# EAGLE board InkTimePCB (EAGLE 9.7.0)
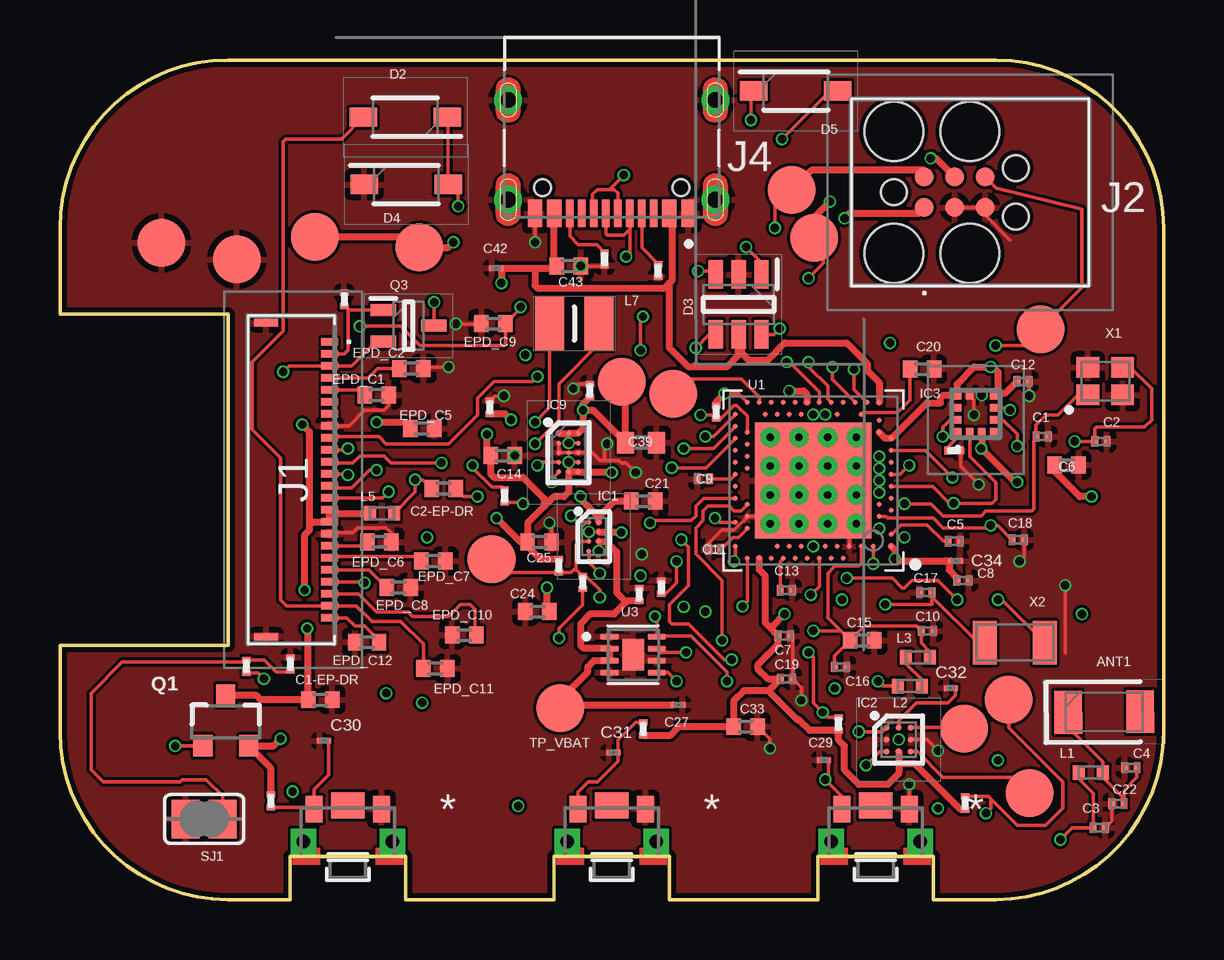
[diagram p0: board, top side]
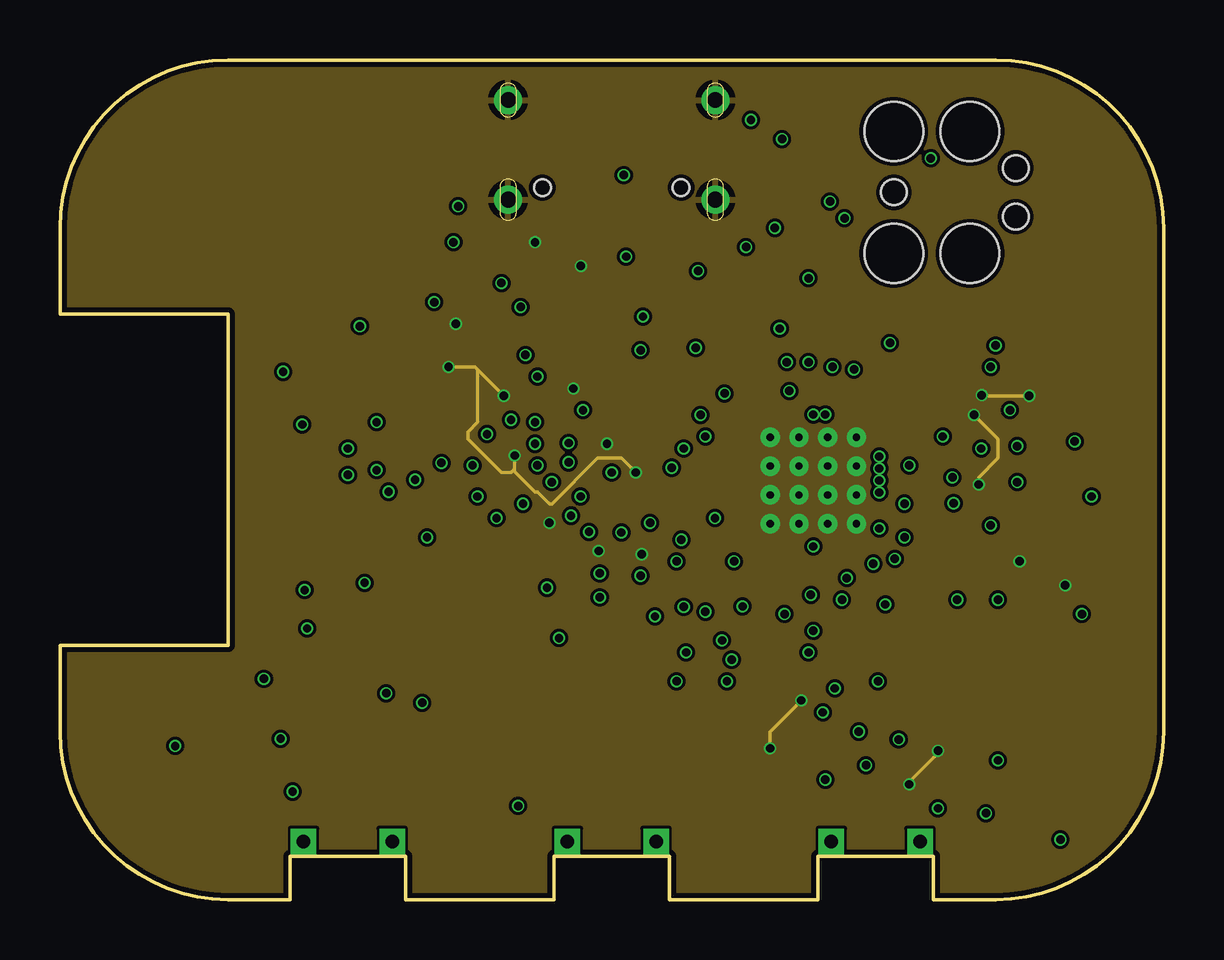
[diagram p1: board, inner layer Route2]
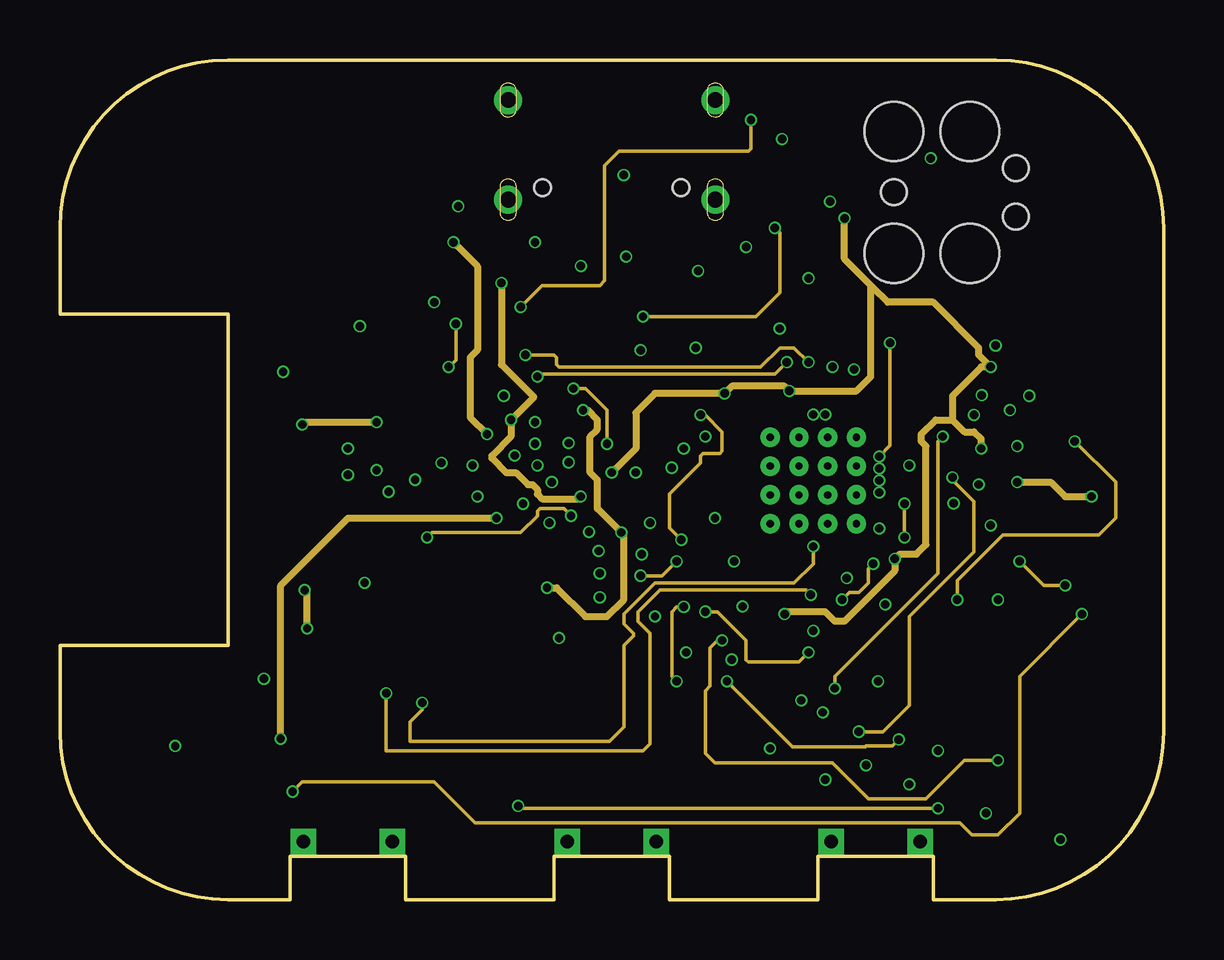
[diagram p2: board, inner layer Route15]
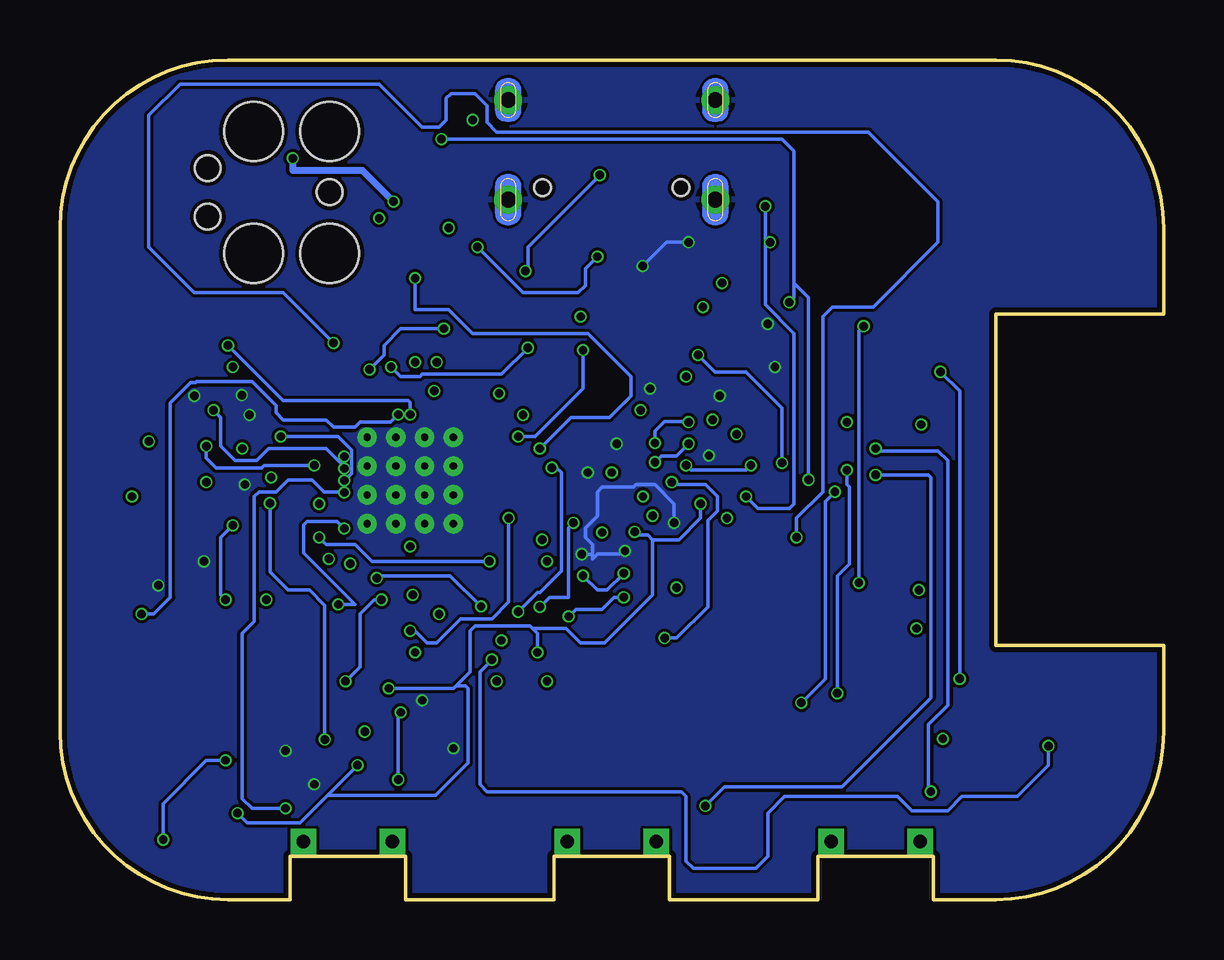
[diagram p3: board, bottom side, seen from below]

Size 46 x 35 mm. Coordinates in mm from the lower left corner, seen from the top.
Outline: 39,0 36.4,0 36.4,1.8 31.6,1.8 31.6,0 25.4,0 25.4,1.8 20.6,1.8 20.6,0 14.4,0 14.4,1.8 9.6,1.8 9.6,0 7,0 arc-90 0,7 0,10.6 7,10.6 7,24.4 0,24.4 0,28 arc-90 7,35 39,35 arc-90 46,28 46,7 arc-90 39,0
Copper layers (1+2*15+16): Top 0.035mm / dielectric 1.6mm / Route2 0.035mm / dielectric 0.15mm / Route15 0.035mm / dielectric 0.2mm / Bottom 0.035mm
Design rules "jlcpcb-2layers.dru *": minimum track width 5mil, minimum drill 0.3mm, track to track 5mil, track to pad 5mil, pad to pad 5mil, via to via 5mil, smd to smd 5mil, copper to edge 0.2mm, drill to drill 6mil, minimum pad ring 10mil, minimum via ring 3mil, stop-mask expansion 4mil, vias tented up to drill 0mil, thermal gap 10mil

## Footprints (pad centres in the part's own frame; a part is rotated, then mirrored left to right if it is on the bottom)
2450AT18B100E_ANTC3216X140N = smd 1.15 x 1.8: 1 -1.5,0; 2 1.5,0
NORDIC_NRF_3_RESC0201_L = smd 0.28 x 0.43: 1 -0.255,0; 2 0.255,0
PERFECT_0402_0402 = smd 0.6 x 0.7: 1 -0.5,0; 2 0.5,0
GRM011R60J152KE01L_1_0201 = smd 0.35 x 0.25: 1 0,0.275; 2 0,-0.275
GRM011R60J152KE01L_2_CAPC0201X13N = smd 0.22 x 0.23: 1 -0.185,0; 2 0.185,0
ESP32_C6_LIBRARY_1_ESP32_WROVER_EAGLE-LTSPICE_C0402 = smd 0.7 x 0.9: 1 -0.65,0; 2 0.65,0
ESP32_C6_LIBRARY_5_SOD3716X135N = smd 1.15 x 0.8: 1 -1.75,0; 2 1.75,0
ESP32_C6_LIBRARY_3_SOT95P280X145-6N = smd 1.2 x 0.6: 1 -1.25,0.95; 2 -1.25,0; 3 -1.25,-0.95; 4 1.25,-0.95; 5 1.25,0; 6 1.25,0.95
BQ25180YBGR_BGA8C40P2X4_100X155X50 = smd 0.2 x 0.2: A1 -0.2,0.6; A2 0.2,0.6; B1 -0.2,0.2; B2 0.2,0.2; C1 -0.2,-0.2; C2 0.2,-0.2; D1 -0.2,-0.6; D2 0.2,-0.6
DRV2605YZFR_BGA9C50P3X3_144X144X62 = smd 0.25 x 0.25: A1 -0.5,0.5; A2 0,0.5; A3 0.5,0.5; B1 -0.5,0; B2 0,0; B3 0.5,0; C1 -0.5,-0.5; C2 0,-0.5; C3 0.5,-0.5
BMA423_BMA423 = smd 0.3 x 0.35: 1 -0.75,-0.775; 2 -0.25,-0.775; 3 0.25,-0.775; 4 0.75,-0.775; 7 0.75,0.775; 8 0.25,0.775; 9 -0.25,0.775; 10 -0.75,0.775 | smd 0.35 x 0.3: 5 0.775,-0.25; 6 0.775,0.25; 11 -0.775,0.25; 12 -0.775,-0.25
RT6160AWSC_BGA15C40P3X5_140X230X60 = smd 0.216 x 0.216: A1 -0.4,0.8; A2 0,0.8; A3 0.4,0.8; B1 -0.4,0.4; B2 0,0.4; B3 0.4,0.4; C1 -0.4,0; C2 0,0; C3 0.4,0; D1 -0.4,-0.4; D2 0,-0.4; D3 0.4,-0.4; E1 -0.4,-0.8; E2 0,-0.8; E3 0.4,-0.8
503480-2400_5034802400 = smd 0.3 x 0.7: 1 -5.75,1.525; 2 -5.25,1.525; 3 -4.75,1.525; 4 -4.25,1.525; 5 -3.75,1.525; 6 -3.25,1.525; 7 -2.75,1.525; 8 -2.25,1.525; 9 -1.75,1.525; 10 -1.25,1.525; 11 -0.75,1.525; 12 -0.25,1.525; 13 0.25,1.525; 14 0.75,1.525; 15 1.25,1.525; 16 1.75,1.525; 17 2.25,1.525; 18 2.75,1.525; 19 3.25,1.525; 20 3.75,1.525; 21 4.25,1.525; 22 4.75,1.525; 23 5.25,1.525; 24 5.75,1.525 | smd 0.3 x 1: MP1 -6.54,-1.125; MP2 6.54,-1.125
TC2030-IDC_TC2030IDC = smd 0.783 x 0.783: 1 -0.953,-0.635; 2 -0.953,0.635; 3 0.317,-0.635; 4 0.317,0.635; 5 1.588,-0.635; 6 1.588,0.635 | hole 2.451: -2.223,-2.54; -2.223,2.54; 0.952,-2.54; 0.952,2.54 | hole 1.067: -2.223,0; 2.857,-1.016; 2.857,1.016
KH-TYPE-C-16P_KINGHELM_KH-TYPE-C-16P = smd 0.6 x 1.15: A1_B12 -3.2,4.725; A4_B9 -2.4,4.725; A9_B4 2.4,4.725; A12_B1 3.2,4.725 | smd 0.3 x 1.15: A5 -1.25,4.725; A6 -0.25,4.725; A7 0.25,4.725; A8 1.25,4.725; B5 1.75,4.725; B6 0.75,4.725; B7 -0.75,4.725; B8 -1.75,4.725 | drill 0.65 pad 1.05: SH1 -4.32,0; SH2 4.32,0; SH3 -4.32,4.15; SH4 4.32,4.15 | hole 0.7: -2.89,3.65; 2.89,3.65
NORDIC_NRF_2_RESC0402_L = smd 0.5 x 0.6: 1 -0.5,0; 2 0.5,0
MLP2016SR47MT0S1_INDC2016X100N = smd 1.2 x 2.2: 1 -1.028,0; 2 1.028,0
ESP32_C6_LIBRARY_4_ESP32_C6_LIBRARY_4_ESP32_C6_LIBRARY_4_ESP32_C6_LIBRARY_4_ESP32_WROVER_SPARKFUN-DISCRETESEMI_SOT23-3 = smd 0.8 x 0.9: 1 -0.95,-1; 2 0.95,-1; 3 0,1.1
ESP32_C6_LIBRARY_6_SOT65P210X110-3N = smd 1.05 x 0.5: 1 -1.05,0.65; 2 -1.05,-0.65; 3 1.05,0
ERA-1AEB3401C_0201 = smd 0.35 x 0.25: 1 0,0.275; 2 0,-0.275
CPF0201D7K68C1_0201 = smd 0.35 x 0.25: 1 0,0.275; 2 0,-0.275
ESP32_C6_LIBRARY_7_JUMPER_SJ = smd 1.168 x 1.6: 1 -0.762,0; 2 0.762,0
2025-10-22_07-23-44_LIBRARY_SW_EVP-AKE31A_PAN = smd 0.711 x 1.092: 1 -1.4,-0.972; 2 1.4,-0.972 | drill 0.559 pad 0.914 square: 3 -1.848,0.381; 4 1.848,0.381 | smd 1.397 x 1.092: 5 0,-1.124
HECTOR_WATCH_1_TP20R = smd 2 x 2: TP 0,0
NORDIC_NRF_4_AQFN50P700X700X85_HS-74N = smd 4.85 x 4.85: P$74 0,0 | drill 0.3 pad 0.6: P$75 -1.8,1.8; P$76 -0.6,1.8; P$77 0.6,1.8; P$78 1.8,1.8; P$79 -1.8,0.6; P$80 -0.6,0.6; P$81 0.6,0.6; P$82 1.8,0.6; P$83 -1.8,-0.6; P$84 -0.6,-0.6; P$85 0.6,-0.6; P$86 1.8,-0.6; P$87 -1.8,-1.8; P$88 -0.6,-1.8; P$89 0.6,-1.8; P$90 1.8,-1.8 | smd 0.2 x 0.2: P$A8 -1.25,3.25; P$A10 -0.75,3.25; P$A12 -0.25,3.25; P$A14 0.25,3.25; P$A16 0.75,3.25; P$A18 1.25,3.25; P$A20 1.75,3.25; P$A22 2.25,3.25; P$A23 2.75,3.25; P$AA24 3.25,-2.25; P$AB2 -2.75,-2.5; P$AC5 -2,-2.75; P$AC9 -1,-2.75; P$AC11 -0.5,-2.75; P$AC13 0,-2.75; P$AC15 0.5,-2.75; P$AC17 1,-2.75; P$AC19 1.5,-2.75; P$AC21 2,-2.75; P$AC24 3.25,-2.75; P$AD2 -2.75,-3.25; P$AD4 -2.25,-3.25; P$AD6 -1.75,-3.25; P$AD8 -1.25,-3.25; P$AD10 -0.75,-3.25; P$AD12 -0.25,-3.25; P$AD14 0.25,-3.25; P$AD16 0.75,-3.25; P$AD18 1.25,-3.25; P$AD20 1.75,-3.25; P$AD22 2.25,-3.25; P$AD23 2.75,-3.25; P$B1 -3.25,2.75; P$B3 -2.5,2.75; P$B5 -2,2.75; P$B7 -1.5,2.75; P$B9 -1,2.75; P$B11 -0.5,2.75; P$B13 0,2.75; P$B15 0.5,2.75; P$B17 1,2.75; P$B19 1.5,2.75; P$B24 3.25,2.75; P$C1 -3.25,2.25; P$D2 -2.75,2; P$D23 2.75,2; P$E24 3.25,1.75; P$F2 -2.75,1.5; P$F23 2.75,1.5; P$G1 -3.25,1.25; P$H2 -2.75,1; P$H23 2.75,1; P$J1 -3.25,0.75; P$J24 3.25,0.75; P$K2 -2.75,0.5; P$L1 -3.25,0.25; P$L24 3.25,0.25; P$M2 -2.75,0; P$N1 -3.25,-0.25; P$N24 3.25,-0.25; P$P2 -2.75,-0.5; P$P23 2.75,-0.5; P$R1 -3.25,-0.75; P$R24 3.25,-0.75; P$T2 -2.75,-1; P$T23 2.75,-1; P$U1 -3.25,-1.25; P$U24 3.25,-1.25; P$V23 2.75,-1.5; P$W1 -3.25,-1.75; P$W24 3.25,-1.75; P$Y2 -2.75,-2; P$Y23 2.75,-2
ESP32_C6_LIBRARY_SON50P200X200X80-9N = smd 0.76 x 0.27: 1 -0.985,0.75; 2 -0.985,0.25; 3 -0.985,-0.25; 4 -0.985,-0.75; 5 0.985,-0.75; 6 0.985,-0.25; 7 0.985,0.25; 8 0.985,0.75 | smd 0.9 x 1.3: 9 0,0
NORDIC_NRF_BT-XTAL_2016_N = smd 0.95 x 0.85: 1 -0.725,-0.575; 2 0.725,-0.575; 3 0.725,0.575; 4 -0.725,0.575
NORDIC_NRF_1_XTAL_3215_N = smd 1 x 1.8: 1 -1.25,0; 2 1.25,0

## Placement (x,y rotation side)
ANT1  2450AT18B100E  [2450AT18B100E_ANTC3216X140N]  43.53,7.82 0.5 top
C1  12pF  [NORDIC_NRF_3_RESC0201_L]  40.94,19.3 0 top
C1-EP-DR  10uF  [PERFECT_0402_0402]  10.85,8.33 0 top
C2  12pF  [NORDIC_NRF_3_RESC0201_L]  43.39,19.1 0 top
C2-EP-DR  4.7uF/25V  [PERFECT_0402_0402]  16,17.13 180 top
C3  1pF  [NORDIC_NRF_3_RESC0201_L]  43.32,3 0 top
C4  1pF  [NORDIC_NRF_3_RESC0201_L]  44.64,5.5 180 top
C5  100nF  [NORDIC_NRF_3_RESC0201_L]  37.27,14.94 0 top
C6  4.7uF  [PERFECT_0402_0402]  41.96,18.11 0 top
C7  100nF  [NORDIC_NRF_3_RESC0201_L]  30.19,11 0 top
C8  100nF  [NORDIC_NRF_3_RESC0201_L]  37.64,13.3 0 top
C9  820pF N.C.  [NORDIC_NRF_3_RESC0201_L]  26.82,17.54 180 top
C10  N.C.  [NORDIC_NRF_3_RESC0201_L]  36.16,11.2 0 top
C11  100pF  [NORDIC_NRF_3_RESC0201_L]  27.29,14.6 180 top
C12  100nF  [NORDIC_NRF_3_RESC0201_L]  40.14,21.6 0 top
C13  N.C.  [NORDIC_NRF_3_RESC0201_L]  30.28,12.9 0 top
C14  4.7uF  [PERFECT_0402_0402]  18.45,18.51 0 top
C15  1.0uF  [PERFECT_0402_0402]  33.44,10.81 0 top
C16  47nF  [NORDIC_NRF_3_RESC0201_L]  32.54,9.7 0 top
C17  12pF  [NORDIC_NRF_3_RESC0201_L]  36.09,12.8 0 top
C18  12pF  [NORDIC_NRF_3_RESC0201_L]  39.94,15 180 top
C19  100nF  [NORDIC_NRF_3_RESC0201_L]  30.29,9.2 0 top
C20  4.7uF  [PERFECT_0402_0402]  35.93,22.11 0 top
C21  4.7uF  [PERFECT_0402_0402]  24.32,16.61 0 top
C22  N.C.  [NORDIC_NRF_3_RESC0201_L]  44.1,4 180 top
C23  0.1uF  [GRM011R60J152KE01L_1_0201]  22.09,21.22 0 top
C24  10uF  [PERFECT_0402_0402]  19.9,12.01 0 top
C25  22uF  [PERFECT_0402_0402]  19.99,14.91 0 top
C27  0.1uF  [GRM011R60J152KE01L_2_CAPC0201X13N]  25.77,8.12 180 top
C29  1uF  [GRM011R60J152KE01L_2_CAPC0201X13N]  31.85,5.82 0 top
C30  1uF  [GRM011R60J152KE01L_2_CAPC0201X13N]  11.01,6.62 0 top
C31  1uF  [GRM011R60J152KE01L_2_CAPC0201X13N]  23.07,6.12 0 top
C32  1uF  [GRM011R60J152KE01L_2_CAPC0201X13N]  37.13,8.82 0 top
C33  22uF  [PERFECT_0402_0402]  28.58,7.21 0 top
C34  0.1uF  [GRM011R60J152KE01L_2_CAPC0201X13N]  37.33,14.12 180 top
C37  1uF  [GRM011R60J152KE01L_1_0201]  24.15,12.72 0 top
C38  1uF  [GRM011R60J152KE01L_1_0201]  17.91,20.52 0 top
C39  10uF  [ESP32_C6_LIBRARY_1_ESP32_WROVER_EAGLE-LTSPICE_C0402]  24.22,19.05 0 top
C42  0.1uF  [GRM011R60J152KE01L_2_CAPC0201X13N]  18.19,26.32 0 top
C43  4.7uF  [PERFECT_0402_0402]  21.21,26.41 0 top
D2  MBR0530  [ESP32_C6_LIBRARY_5_SOD3716X135N]  14.39,32.61 180 top
D3  USBLC6-2SC6Y  [ESP32_C6_LIBRARY_3_SOT95P280X145-6N]  28.29,24.81 270 top
D4  MBR0530  [ESP32_C6_LIBRARY_5_SOD3716X135N]  14.43,29.81 0 top
D5  MBR0530  [ESP32_C6_LIBRARY_5_SOD3716X135N]  30.67,33.71 0 top
EPD_C1  1uF/50V  [PERFECT_0402_0402]  13.2,21.03 180 top
EPD_C2  1uF/50V  [PERFECT_0402_0402]  14.65,22.13 180 top
EPD_C5  1uF/50V  [PERFECT_0402_0402]  15.1,19.63 180 top
EPD_C6  1uF/50V  [PERFECT_0402_0402]  13.32,14.91 180 top
EPD_C7  1uF/50V  [PERFECT_0402_0402]  15.57,14.11 180 top
EPD_C8  1uF/50V  [PERFECT_0402_0402]  14.12,13.01 180 top
EPD_C9  1uF/50V  [PERFECT_0402_0402]  18.07,24.01 0 top
EPD_C10  1uF/50V  [PERFECT_0402_0402]  16.85,11.03 0 top
EPD_C11  1uF/50V  [PERFECT_0402_0402]  15.65,9.63 180 top
EPD_C12  1uF/50V  [PERFECT_0402_0402]  12.8,10.73 0 top
IC1  BQ25180YBGR  [BQ25180YBGR_BGA8C40P2X4_100X155X50]  22.25,15.13 0 top
IC2  DRV2605YZFR  [DRV2605YZFR_BGA9C50P3X3_144X144X62]  34.96,6.67 0 top
IC3  BMA423  [BMA423_BMA423]  38.17,20.25 0 top
IC9  RT6160AWSC  [RT6160AWSC_BGA15C40P3X5_140X230X60]  21.2,18.63 0 top
J1  503480-2400  [503480-2400_5034802400]  9.72,17.5 270 top
J2  TC2030-IDC  [TC2030-IDC_TC2030IDC]  36.98,29.48 0 top
J4  KH-TYPE-C-16P  [KH-TYPE-C-16P_KINGHELM_KH-TYPE-C-16P]  23,33.33 180 top
L1  3.9nH  [NORDIC_NRF_2_RESC0402_L]  42.97,5.3 0 top
L2  10uH  [NORDIC_NRF_2_RESC0402_L]  35.42,8.9 0 top
L3  15nH  [NORDIC_NRF_2_RESC0402_L]  35.77,10.1 0 top
L5  68uH  [NORDIC_NRF_2_RESC0402_L]  13.42,16.1 0 top
L7  FTC252012SR47MBCA  [MLP2016SR47MT0S1_INDC2016X100N]  21.44,24.01 0 top
Q1  DMG2305UX-7 20V/4.2A/52mΩ/1.4W  [ESP32_C6_LIBRARY_4_ESP32_C6_LIBRARY_4_ESP32_C6_LIBRARY_4_ESP32_C6_LIBRARY_4_ESP32_WROVER_SPARKFUN-DISCRETESEMI_SOT23-3]  6.91,7.41 0 top
Q3  SI1308EDL-T1-GE3  [ESP32_C6_LIBRARY_6_SOT65P210X110-3N]  14.53,23.92 0 top
R1_EP_DR  0.47  [ERA-1AEB3401C_0201]  7.77,9.72 0 top
R1_USB  5K1  [CPF0201D7K68C1_0201]  24.93,26.22 180 top
R2  0  [ERA-1AEB3401C_0201]  21.79,13.22 0 top
R2_EP_DR  10K  [ERA-1AEB3401C_0201]  11.85,25.02 0 top
R2_USB  5K1  [CPF0201D7K68C1_0201]  22.7,26.7 0 top
R3  0  [CPF0201D7K68C1_0201]  37.27,18.72 270 top
R4  0  [ERA-1AEB3401C_0201]  18.53,16.82 180 top
R5  10k  [CPF0201D7K68C1_0201]  8.79,4.12 180 top
R7  10k  [CPF0201D7K68C1_0201]  32.45,7.32 0 top
R8  10k  [CPF0201D7K68C1_0201]  24.31,7.12 0 top
R9  10K  [ERA-1AEB3401C_0201]  25.07,13.02 0 top
R17  3K3  [ERA-1AEB3401C_0201]  37.73,4.02 180 top
R18  3K3  [ERA-1AEB3401C_0201]  20.79,13.92 0 top
R_PWR_EPD  10K  [CPF0201D7K68C1_0201]  27.35,20.32 180 top
R_TYPE_SEL  2.2  [ERA-1AEB3401C_0201]  9.61,9.82 0 top
SJ1  0  [ESP32_C6_LIBRARY_7_JUMPER_SJ]  6.01,3.36 0 top
SW_DN  2025-10-22_07-23-44_LIBRARY_EVP-AKE31ASW_EVP-AKE31A_PAN  [2025-10-22_07-23-44_LIBRARY_SW_EVP-AKE31A_PAN]  34,2.8 180 top
SW_ENT  2025-10-22_07-23-44_LIBRARY_EVP-AKE31ASW_EVP-AKE31A_PAN  [2025-10-22_07-23-44_LIBRARY_SW_EVP-AKE31A_PAN]  23,2.8 180 top
SW_UP  2025-10-22_07-23-44_LIBRARY_EVP-AKE31ASW_EVP-AKE31A_PAN  [2025-10-22_07-23-44_LIBRARY_SW_EVP-AKE31A_PAN]  12,2.8 180 top
TP_3.3V  HECTOR_WATCH_1_TPTP20R  [HECTOR_WATCH_1_TP20R]  14.98,27.18 0 top
TP_3V3  HECTOR_WATCH_1_TPTP20R  [HECTOR_WATCH_1_TP20R]  10.63,27.63 0 top
TP_BAT_GND  HECTOR_WATCH_1_TPTP20R  [HECTOR_WATCH_1_TP20R]  4.23,27.38 0 top
TP_GND  HECTOR_WATCH_1_TPTP20R  [HECTOR_WATCH_1_TP20R]  7.37,26.68 0 top
TP_ON  HECTOR_WATCH_1_TPTP20R  [HECTOR_WATCH_1_TP20R]  40.41,4.43 0 top
TP_OP  HECTOR_WATCH_1_TPTP20R  [HECTOR_WATCH_1_TP20R]  37.69,7.13 0 top
TP_RESET  HECTOR_WATCH_1_TPTP20R  [HECTOR_WATCH_1_TP20R]  40.87,23.78 0 top
TP_SCL  HECTOR_WATCH_1_TPTP20R  [HECTOR_WATCH_1_TP20R]  39.55,8.33 0 top
TP_SDA  HECTOR_WATCH_1_TPTP20R  [HECTOR_WATCH_1_TP20R]  17.99,14.18 0 top
TP_SWDCLK  HECTOR_WATCH_1_TPTP20R  [HECTOR_WATCH_1_TP20R]  31.43,27.58 0 top
TP_SWDIO  HECTOR_WATCH_1_TPTP20R  [HECTOR_WATCH_1_TP20R]  30.5,29.58 0 top
TP_SWO  HECTOR_WATCH_1_TPTP20R  [HECTOR_WATCH_1_TP20R]  25.56,21.08 0 top
TP_VBAT  HECTOR_WATCH_1_TPTP20R  [HECTOR_WATCH_1_TP20R]  20.85,7.98 0 top
TP_VREG  HECTOR_WATCH_1_TPTP20R  [HECTOR_WATCH_1_TP20R]  23.41,21.58 0 top
U1  NRF52840_QF  [NORDIC_NRF_4_AQFN50P700X700X85_HS-74N]  31.4,17.47 180 top
U3  MAX17048G+T10  [ESP32_C6_LIBRARY_SON50P200X200X80-9N]  23.89,10.21 0 top
X1  32MHz  [NORDIC_NRF_BT-XTAL_2016_N]  43.57,21.61 0 top
X2  32.768kHz  [NORDIC_NRF_1_XTAL_3215_N]  39.8,10.71 0 top

## Library data of the parts
ANT1 = InkTime_v5; ARROW_PART_NUMBER: 2450AT18B100E; ARROW_PRICE-STOCK: https://www.arrow.com/en/products/2450at18b100e/johanson-dielectrics?utm_currency=USD&region=nac; DESCRIPTION: Antennas 2.45GHz ANTENNA; HEIGHT: 1.4mm; MANUFACTURER_NAME: JOHANSON TECHNOLOGY; MANUFACTURER_PART_NUMBER: 2450AT18B100E; MOUSER_PART_NUMBER: 609-2450AT18B100E; MOUSER_PRICE-STOCK: https://www.mouser.co.uk/ProductDetail/Johanson-Technology/2450AT18B100E?qs=yCnrNFeXz%252Bh5MFsFIXGZGA%3D%3D
C1 C1-EP-DR C2 C2-EP-DR C3-C25 C33 C37 C38 C43 EPD_C1 EPD_C2 EPD_C5-EPD_C12 L1-L3 L5 R1_EP_DR R1_USB R2 R2_EP_DR R2_USB R3-R5 R7-R9 R17 R18 R_PWR_EPD R_TYPE_SEL SJ1 TP_3.3V TP_3V3 TP_BAT_GND TP_GND TP_ON TP_OP TP_RESET TP_SCL TP_SDA TP_SWDCLK TP_SWDIO TP_SWO TP_VBAT TP_VREG U1 X1 X2 = InkTime_v5
C27 C29-C32 C34 C42 = InkTime_v5; AVAILABILITY: In Stock; CHECK_PRICES: https://www.snapeda.com/parts/GRM011R60J152KE01L/Murata/view-part/?ref=eda; DESCRIPTION: SMD Capacitor X5R(EIA) with Capacitance: 1500pF Tol. 10%. Rated Voltage: 6.3Vdc; MF: Murata; MP: GRM011R60J152KE01L; PACKAGE: 0201 Murata; PRICE: None; SNAPEDA_LINK: https://www.snapeda.com/parts/GRM011R60J152KE01L/Murata/view-part/?ref=snap
C39 = InkTime_v5; SPICEMODEL: NONE; SPICEPREFIX: C
D2 D4 D5 = InkTime_v5; AVAILABILITY: In Stock; CHECK_PRICES: https://www.snapeda.com/parts/MBR0530/Onsemi/view-part/?ref=eda; DESCRIPTION: Diode Schottky 30 V 500mA Surface Mount SOD-123; MF: ON Semiconductor; MP: MBR0530; PACKAGE: SOD-123-2 ON Semiconductor; PRICE: None; PURCHASE-URL: https://www.snapeda.com/api/url_track_click_mouser/?unipart_id=179458&manufacturer=ON Semiconductor&part_name=MBR0530&search_term=None; SNAPEDA_LINK: https://www.snapeda.com/parts/MBR0530/Onsemi/view-part/?ref=snap
D3 = InkTime_v5; AVAILABILITY: In Stock; CHECK_PRICES: https://www.snapeda.com/parts/USBLC6-2SC6Y/STMicroelectronics/view-part/?ref=eda; DESCRIPTION: 17V Clamp 5A (8/20µs) Ipp Tvs Diode Surface Mount SOT-23-6; MF: STMicroelectronics; MP: USBLC6-2SC6Y; PACKAGE: SOT-23-6 STMicroelectronics; PRICE: None; SNAPEDA_LINK: https://www.snapeda.com/parts/USBLC6-2SC6Y/STMicroelectronics/view-part/?ref=snap
IC1 = InkTime_v5; ARROW_PART_NUMBER: BQ25180YBGR; ARROW_PRICE-STOCK: https://www.arrow.com/en/products/bq25180ybgr/texas-instruments?utm_currency=USD&region=nac; DESCRIPTION: Charger IC Lithium Ion/Polymer, Lithium Iron Phosphate 8-DSBGA (1.6x1.1); HEIGHT: 0.5mm; MANUFACTURER_NAME: Texas Instruments; MANUFACTURER_PART_NUMBER: BQ25180YBGR; MOUSER_PART_NUMBER: 595-BQ25180YBGR; MOUSER_PRICE-STOCK: https://www.mouser.co.uk/ProductDetail/Texas-Instruments/BQ25180YBGR?qs=doiCPypUmgEWjAK%252BJAX6Tw%3D%3D
IC2 = InkTime_v5; ARROW_PART_NUMBER: DRV2605YZFR; ARROW_PRICE-STOCK: https://www.arrow.com/en/products/drv2605yzfr/texas-instruments?region=nac; DESCRIPTION: Haptic Driver for ERM/LRA with Built-In Library and Smart Loop Architecture; HEIGHT: 0.625mm; MANUFACTURER_NAME: Texas Instruments; MANUFACTURER_PART_NUMBER: DRV2605YZFR
IC3 = InkTime_v5; ARROW_PART_NUMBER: BMA423; ARROW_PRICE-STOCK: https://www.arrow.com/en/products/bma423/bosch; DESCRIPTION: Accelerometers Triaxial low-g 12bit Acceleration Sensor; HEIGHT: 1mm; MANUFACTURER_NAME: BOSCH; MANUFACTURER_PART_NUMBER: BMA423; MOUSER_PART_NUMBER: 262-BMA423; MOUSER_PRICE-STOCK: https://www.mouser.co.uk/ProductDetail/Bosch-Sensortec/BMA423?qs=HXFqYaX1Q2xC%252BSgeGoX3mg%3D%3D
IC9 = InkTime_v5; DESCRIPTION: Buck-Boost Regulator Positive Output Step-Up/Step-Down I2C DC-DC Controller IC 15-WL-CSP (BSC) (1.4x2.3); HEIGHT: 0.6mm; MANUFACTURER_NAME: RICHTEK; MANUFACTURER_PART_NUMBER: RT6160AWSC; MOUSER_PART_NUMBER: 835-RT6160AWSC; MOUSER_PRICE-STOCK: https://www.mouser.co.uk/ProductDetail/Richtek/RT6160AWSC?qs=amGC7iS6iy%2FLd9PSoixZXQ%3D%3D
J1 = InkTime_v5; DESCRIPTION: FFC & FPC Connectors 0.5mm FPC RA SMT Dual Contact 24Ckt; HEIGHT: 1.87mm; MANUFACTURER_NAME: Molex; MANUFACTURER_PART_NUMBER: 503480-2400; MOUSER_PART_NUMBER: 538-503480-2400; MOUSER_PRICE-STOCK: https://www.mouser.co.uk/ProductDetail/Molex/503480-2400?qs=OAhjpuo3Vu7efIoxFh9AOw%3D%3D
J2 = InkTime_v5; DESCRIPTION: CABLE ADAPTER 6 POS; HEIGHT: 19mm; MANUFACTURER_NAME: Tag Connect; MANUFACTURER_PART_NUMBER: TC2030-IDC
J4 = InkTime_v5; AVAILABILITY: Not in stock; CHECK_PRICES: https://www.snapeda.com/parts/KH-TYPE-C-16P/Kinghelm/view-part/?ref=eda; MF: kinghelm; MP: KH-TYPE-C-16P; PACKAGE: None; PRICE: None; SNAPEDA_LINK: https://www.snapeda.com/parts/KH-TYPE-C-16P/Kinghelm/view-part/?ref=snap
L7 = InkTime_v5; DESCRIPTION: SMD / SMT Inductors (Coils), L=0.47?H, L x W x T :; HEIGHT: 1mm; JLCPCB: https://jlcpcb.com/partdetail/6763488-FTC252012SR47MBCA/C5832368; MANUFACTURER_NAME: TDK; MANUFACTURER_PART_NUMBER: FTC252012SR47MBCA
Q1 = InkTime_v5; PROD_ID: TRAN-14388
Q3 = InkTime_v5; AVAILABILITY: In Stock; CHECK_PRICES: https://www.snapeda.com/parts/SI1308EDL-T1-GE3/Vishay+Siliconix/view-part/?ref=eda; DESCRIPTION: Si1308EDL-T1-GE3 N-channel MOSFET Transistor, 1.5 A, 30 V, 3-Pin SC-70 | Siliconix / Vishay SI1308EDL-T1-GE3; MF: Vishay Siliconix; MP: SI1308EDL-T1-GE3; PACKAGE: SOT-323 Vishay Semiconductor; PRICE: None; PURCHASE-URL: https://www.snapeda.com/api/url_track_click_mouser/?unipart_id=274603&manufacturer=Vishay Siliconix&part_name=SI1308EDL-T1-GE3&search_term=None; SNAPEDA_LINK: https://www.snapeda.com/parts/SI1308EDL-T1-GE3/Vishay+Siliconix/view-part/?ref=snap
SW_DN SW_ENT SW_UP = InkTime_v5; COPYRIGHT: Copyright (C) 2025 Ultra Librarian. All rights reserved.; DIGI-KEY_PART_NUMBER_1: P123437TR-ND; DIGI-KEY_PART_NUMBER_2: P123437CT-ND; DIGI-KEY_PART_NUMBER_3: P123437DKR-ND; MANUFACTURER_NAME: Panasonic; MANUFACTURER_PART_NUMBER: EVP-AKE31A
U3 = InkTime_v5; AVAILABILITY: In Stock; CHECK_PRICES: https://www.snapeda.com/parts/MAX17048G+T10/Analog+Devices/view-part/?ref=eda; DESCRIPTION: 3µA 1-Cell/2-Cell Fuel Gauge with ModelGauge; MF: Analog Devices; MP: MAX17048G+T10; PACKAGE: TDFN-8 Maxim; PRICE: None; PURCHASE-URL: https://www.snapeda.com/api/url_track_click_mouser/?unipart_id=329239&manufacturer=Analog Devices&part_name=MAX17048G+T10&search_term=None; SNAPEDA_LINK: https://www.snapeda.com/parts/MAX17048G+T10/Analog+Devices/view-part/?ref=snap

## Nets
3V3: C6.1 C7.1 C8.1 C12.1 C14.1 C19.1 C25.1 C33.1 C34.2 IC2.C2 IC3.3 IC3.7 IC3.10 IC9.E2 IC9.E3 J2.1 Q1.2 R5.2 R7.2 R8.2 R17.1 R18.1 R_PWR_EPD.2 TP_3.3V.TP TP_3V3.TP U1.P$A22 U1.P$AD14 U1.P$AD23 U1.P$B1 U1.P$W1 U1.P$Y2
ALERT: U1.P$J24 U3.5
D+: D3.4 U1.P$AD6
D-: D3.6 U1.P$AD4
DEC1: C5.1 U1.P$C1
DEC3: C11.1 U1.P$D23
DEC4_6: C10.1 C15.1 C16.1 L3.2 U1.P$B5 U1.P$E24
DN: D3.1 J4.A7 J4.B7
DP: D3.3 J4.A6 J4.B6
EPD_3V3: C1-EP-DR.1 EPD_C5.2 J1.15 J1.16 L5.1 Q1.3
EPD_BUSY: J1.9 U1.P$AD12
EPD_CS: J1.12 U1.P$K2
EPD_DC: J1.11 U1.P$AD10
EPD_RST: J1.10 U1.P$AC11
GDR: J1.2 Q3.1 R2_EP_DR.2
GND: C1-EP-DR.2 C1.2 C2.2 C3.2 C4.2 C5.2 C6.2 C7.2 C8.2 C9.2 C10.2 C11.2 C12.2 C13.2 C14.2 C15.2 C16.2 C17.1 C18.1 C19.2 C20.2 C21.2 C22.2 C23.1 C24.1 C25.2 C27.1 C29.1 C30.1 C31.1 C32.1 C33.2 C34.1 C37.1 C38.1 C39.2 C42.1 C43.2 D3.2 D4.1 EPD_C1.1 EPD_C2.1 EPD_C5.1 EPD_C6.1 EPD_C7.1 EPD_C8.1 EPD_C9.1 EPD_C10.1 EPD_C11.1 EPD_C12.1 IC1.D2 IC2.B1 IC2.B3 IC3.8 IC3.9 IC9.B1 IC9.C1 IC9.C2 IC9.C3 J1.8 J1.17 J1.MP1 J1.MP2 J2.3 J2.5 J4.A1_B12 J4.A12_B1 J4.SH1 J4.SH2 J4.SH3 J4.SH4 R1_USB.1 R2_EP_DR.1 R2_USB.2 R3.1 R9.1 R_TYPE_SEL.1 SJ1.1 SW_DN.1 SW_ENT.1 SW_UP.1 TP_BAT_GND.TP TP_GND.TP U1.P$74 U1.P$75 U1.P$76 U1.P$77 U1.P$78 U1.P$79 U1.P$80 U1.P$81 U1.P$82 U1.P$83 U1.P$84 U1.P$85 U1.P$86 U1.P$87 U1.P$88 U1.P$89 U1.P$90 U1.P$B7 U1.P$F23 U3.1 U3.4 U3.6 U3.9 X1.2 X1.4
HAPTIC_EN: IC2.A1 U1.P$U1
IMU_INT1: IC3.5 U1.P$N1
IMU_INT2: IC3.6 U1.P$P2
LX1: IC9.B2 IC9.B3 L7.1
LX2: IC9.D2 IC9.D3 L7.2
MOSI: J1.14 U1.P$B13
N$1: ANT1.1 C4.1 C22.1 L1.2
N$2: IC9.D1 R4.2
N$3: IC1.D1 R9.2
N$4: C2.1 U1.P$A23 X1.3
N$5: IC9.E1 R2.2
N$6: J4.A5 R1_USB.2
N$7: L2.2 L3.1
N$8: IC3.1 R3.2
N$9: C1.1 U1.P$B24 X1.1
N$10: C3.1 L1.1 U1.P$H23
N$11: C32.2 IC2.A2
N$13: C2-EP-DR.1 D2.1 D4.2
N$14: C9.1 U1.P$N24
N$15: R1_EP_DR.1 R_TYPE_SEL.2 SJ1.2
N$16: C2-EP-DR.2 D5.2 L5.2 Q3.3
N$17: EPD_C2.2 J1.4
N$18: EPD_C1.2 J1.5
N$20: C20.1 U1.P$AC5
N$22: L2.1 U1.P$B3
N$26: J4.B5 R2_USB.1
N$30: EPD_C6.2 J1.18
N$31: EPD_C7.2 J1.19
N$32: EPD_C8.2 J1.20
N$34: EPD_C10.2 J1.22
N$35: C13.1 U1.P$A18
N$37: EPD_C12.2 J1.24
OUT+: IC2.A3 TP_OP.TP
OUT-: IC2.C3 TP_ON.TP
P0.00/XL1: C17.2 U1.P$D2 X2.1
P0.01/XL2: C18.2 U1.P$F2 X2.2
P0.04: U1.P$J1
P0.09: U1.P$L24
P0.13: C30.2 R5.1 SW_UP.2
P0.14: C31.2 R8.1 SW_ENT.2
P0.19: U1.P$AC15
P0.20: U1.P$AD16
P0.21: U1.P$AC17
P0.22: U1.P$AD18
P0.23: U1.P$AC19
P0.24: U1.P$AD20
P0.25: U1.P$AC21
P0.26: U1.P$G1
P0.27: U1.P$H2
P0.28: U1.P$B11
P0.29: U1.P$A10
P0.30: U1.P$B9
P0.31: U1.P$A8
P1.01: Q1.1 R_PWR_EPD.1 U1.P$Y23
P1.02: C29.2 R7.1 SW_DN.2 U1.P$W24
P1.03: U1.P$V23
P1.04: U1.P$U24
P1.05: U1.P$T23
P1.06: U1.P$R24
P1.07: U1.P$P23
P1.09: U1.P$R1
P1.10: U1.P$A20
P1.11: U1.P$B19
P1.12: U1.P$B17
P1.13: U1.P$A16
P1.14: U1.P$B15
P1.15: U1.P$A14
PMIC_INT: IC1.A1 U1.P$T2
PO.13: U1.P$AD8
PO.14: U1.P$AC9
PREVGH: D5.1 EPD_C9.2 J1.21
PREVGL: D2.2 EPD_C11.2 J1.23
RESE: J1.3 Q3.2 R1_EP_DR.2
RESET: J2.6 TP_RESET.TP U1.P$AC13
SCK: J1.13 U1.P$A12
SCL: IC1.B1 IC2.C1 IC3.12 R4.1 R17.2 TP_SCL.TP U1.P$M2 U3.7
SDA: IC1.C1 IC2.B2 IC3.2 R2.1 R18.2 TP_SDA.TP U1.P$L1 U3.8
SWDCLK: J2.4 TP_SWDCLK.TP U1.P$AA24
SWDIO: J2.2 TP_SWDIO.TP U1.P$AC24
SWO: TP_SWO.TP U1.P$AD22
VBAT: C27.2 C37.2 IC1.C2 TP_VBAT.TP U3.2 U3.3
VBUS: C21.1 C38.2 C42.2 C43.1 D3.5 IC1.A2 J4.A4_B9 J4.A9_B4 U1.P$AD2
VREG: C23.2 C24.2 C39.1 IC1.B2 IC9.A1 IC9.A2 IC9.A3 TP_VREG.TP

## Tracks (layer width: path | path; a pad name or v marks a point on that pad's centre or on a via)
3V3  (via drill 0.35)
  Top 0.15: U1.P$AD23 28.3,21.07 28.3,21.1 v27.7,21.1
  Top 0.3: TP_3V3.TP 14.53,27.63 TP_3.3V.TP 16.18,27.18 v16.4,27.4 | v17.8,19.4 17.8,18.66 C14.1 17.95,17.75 18.1,17.6 19.3,17.6 20.2,16.7 20.2,16.4 | 20.2,16.4 20.6,16.8 21,16.8 21.2,17 IC9.E2 IC9.E3 22.97,17.83 v23,17.8 | 20.2,16.4 19.49,15.69 C25.1 | C25.1 19.49,14.71 20,14.19 R18.1 | R8.2 25.45,6.84 25.81,7.21 C33.1 28.08,8.28 28.5,8.7 29.54,8.7 | 29.54,8.7 C19.1 29.5,9.2 29.1,9.6 29.1,9.8 29.93,10.64 C7.1 29.57,11.37 | 29.57,11.37 29.4,11.53 29.4,13.5 29.15,13.75 U1.P$A22 | U1.P$B1 34.8,14.57 v34.8,14.2 34.9,14.1 36.9,14.1 | v30.2,11.9 29.67,11.37 29.57,11.37 | C8.1 37.39,13.41 37.06,13.74 37.06,14.1 36.9,14.1 | C12.1 39.39,21.1 39.1,21.1 | 39.1,21.1 39,21.1 IC3.7 | IC3.3 38.42,18.82 | 38.42,18.82 v38.4,18.8 | 39.1,21.1 39.1,22 38.9,22.2 v38.8,22.2 38.1,22.2 37.4,21.5 37.4,21.05 IC3.10 36.83,21.03 36.7,20.9 36.7,20.7 36.13,20.7 U1.P$W1 34.4,19.22 U1.P$Y2 | J2.1 35.78,28.6 32.9,28.6 v32.7,28.4 | R5.2 8.79,5.48 Q1.2 8.91,6.41 v9.2,6.7 | C25.1 19.19,14.91 v18.2,15.9 | IC2.C2 34.96,5.66 | 34.96,5.66 34.96,5.26 34.5,4.8 33.3,4.8 32.7,5.4 32.7,6.4 32.45,6.65 R7.2 31.25,7.05 30.8,7.5 30.74,7.5 29.54,8.7 | R17.1 37.56,3.75 35.64,5.66 34.96,5.66 | v30.4,21.2 31,21.2 31.14,21.06 31.14,20.74 U1.P$AD14 | v27.7,21.1 27.35,20.75 R_PWR_EPD.2 | 36.9,14.1 36.92,14.12 C34.2 | 38.42,18.82 38.42,18.78 39.8,17.4 v39.9,17.4 | v43,16.8 42.5,16.8 41.46,17.84 C6.1
  Route15 0.3: v16.4,27.4 17.4,26.4 17.4,22.9 17.1,22.6 17.1,20.1 v17.8,19.4 | v34.8,14.2 34.8,13.7 32.7,11.6 32.3,11.6 31.9,12 30.3,12 v30.2,11.9 | v38.4,18.8 38.4,19.2 38.1,19.5 37.7,19.5 37.2,20 | 37.2,20 37.2,21 38.4,22.2 v38.8,22.2 38.3,22.7 38.3,23 36.4,24.9 34.5,24.9 33.85,25.55 | 37.2,20 36.5,20 35.9,19.4 35.9,19.1 36.1,18.9 36.1,14.8 35.7,14.4 35,14.4 v34.8,14.2 | v23,17.8 24,18.8 24,20.3 24.8,21.1 v27.7,21.1 28,21.4 30.2,21.4 v30.4,21.2 33.2,21.2 33.8,21.8 33.8,25.5 33.85,25.55 | v9.2,6.7 9.2,13.1 12,15.9 v18.2,15.9 | v34.8,14.2 34.9,14.3 | 33.85,25.55 32.7,26.7 v32.7,28.4 | v39.9,17.4 41.3,17.4 41.9,16.8 v43,16.8
ALERT  (via drill 0.35)
  Top 0.15: U3.5 25.34,9.46 v25.7,9.1 | v24.6,15.7 24.7,15.8 26.3,15.8 26.5,16 26.5,16.4 26.82,16.72 U1.P$J24
  Route15 0.15: v25.7,9.1 25.5,9.3 25.5,12 25.7,12.2 v26,12.2
  Bottom 0.15: v26,12.2 25.6,12.6 24.8,12.6 24.8,15.5 v24.6,15.7
D+  (via drill 0.35)
  Top 0.15: U1.P$AD6 32.2,21.67 v32.2,22.2 | v26.5,23 27.06,23.56 D3.4
  Bottom 0.15: v32.2,22.2 31.8,21.8 31,21.8 30.9,21.9 27.6,21.9 v26.5,23
D-  (via drill 0.35)
  Top 0.15: U1.P$AD4 33.1,21.27 v33.1,22.1 | v30,23.8 29.76,23.56 D3.6
  Bottom 0.15: v33.1,22.1 32.5,22.7 32.5,23.1 31.8,23.8 v30,23.8
DEC1
  Top 0.15: C5.1 36.81,14.94 36.14,15.62 35.05,15.62 U1.P$C1
DEC3
  Top 0.15: C11.1 28.04,15.1 28.28,15.1 U1.P$D23
DEC4_6  (via drill 0.35)
  Top 0.15: C16.1 32.28,10.16 C15.1 | C15.1 32,11.75 32,13.6 32.3,13.9 33.3,13.9 33.4,14 U1.P$B5 | U1.P$E24 27.48,15.72 v27.3,15.9 | v31.4,11.2 32.55,11.2 C15.1 | L3.2 36.27,10.33 35.9,10.7 35.91,10.71 C10.1 35.7,11.4 33.53,11.4 C15.1
  Bottom 0.15: v27.3,15.9 27.3,12.4 28,11.7 29.3,11.7 30.3,10.7 30.7,10.7 31.2,11.2 v31.4,11.2
DN  (via drill 0.35)
  Top 0.15: J4.A7 22.75,27.75 22.8,27.7 23.5,27.7 23.75,27.95 | J4.B7 23.75,27.95 | 23.75,27.95 23.75,26.95 v23.6,26.8 | v28.6,27.2 29.24,26.56 D3.1
  Bottom 0.15: v23.6,26.8 24.1,26.3 24.1,25.6 24.4,25.3 26.7,25.3 v28.6,27.2
DP  (via drill 0.35)
  Top 0.15: J4.B6 22.2,28.65 22.2,29.4 22.4,29.6 22.9,29.6 | J4.A6 23.25,29.45 23.1,29.6 22.9,29.6 | 22.9,29.6 v23.5,30.2 | v26.6,26.2 27.2,26.2 D3.3
  Bottom 0.15: v23.5,30.2 26.5,27.2 26.5,26.3 v26.6,26.2
EPD_3V3  (via drill 0.35)
  Top 0.3: Q1.3 8.19,8.51 8.37,8.33 C1-EP-DR.1 10.35,11.25 v10.3,11.3 | v10.2,12.9 10.2,15.2 10.4,15.4 10.4,15.6 | 10.4,15.6 10.55,15.75 J1.16 J1.15 11.39,16.1 L5.1 | 10.4,15.6 10.4,19.5 v10.1,19.8 | v13.2,19.9 14.33,19.9 EPD_C5.2
  Route15 0.3: v10.3,11.3 10.3,12.8 v10.2,12.9 | v10.1,19.8 10.2,19.9 v13.2,19.9
EPD_BUSY  (via drill 0.35)
  Top 0.15: U1.P$AD12 31.65,21.15 30.4,22.4 v30.3,22.4 | v19.9,21.8 19.7,21.6 18.1,21.6 17.4,20.9 17.4,20.2 16.2,19 13.6,19 13.3,19.3 11.29,19.3 J1.9
  Route15 0.15: v30.3,22.4 29.8,21.9 20,21.9 v19.9,21.8
EPD_CS  (via drill 0.35)
  Top 0.152: J1.12 11.95,17.75 v12,17.7
  Route15 0.152: v36.6,3.8 19.2,3.8 v19.1,3.9
  Bottom 0.152: v12,17.7 9.8,17.7 9.7,17.6 9.7,8.4 13.4,4.7 18.3,4.7 v19.1,3.9 | v36.6,3.8 38,3.8 38.4,4.2 38.4,11.1 37.9,11.6 37.9,16.8 37.7,17 37,17 36.5,17.5 35.5,17.5 35,17 34.18,17 U1.P$K2
  other vias: 34.15,16.97
EPD_DC  (via drill 0.35)
  Top 0.15: U1.P$AD10 32,20.87 32,21.4 31.2,22.2 v31.2,22.4 | v15.9,18.2 13.8,18.2 13.5,18.5 12.5,18.5 12.2,18.2 11.29,18.2 J1.11
  Route15 0.15: v31.2,22.4 30.6,23 30,23 29.2,22.2 20.8,22.2 20.7,22.3 20.7,22.6 20.6,22.7 v19.4,22.7
  Bottom 0.15: v19.4,22.7 18.7,22 17.4,22 15.9,20.5 v15.9,18.2
EPD_RST  (via drill 0.35)
  Top 0.152: J1.10 11.95,18.75 v12,18.8
  Route15 0.152: v9.7,4.5 10.1,4.9 15.6,4.9 17.3,3.2 37.5,3.2 38,2.7 39.1,2.7 40,3.6 40,9.3 v42.6,11.9
  Bottom 0.152: v12,18.8 11.9,18.7 9.4,18.7 9,18.3 9,8.1 9.8,7.3 9.8,4.6 v9.7,4.5 | v42.6,11.9 42.1,11.9 41.4,12.6 41.4,20.7 40.55,21.55 40.35,21.55 40.3,21.6 38,21.6 37,20.6 37,20.3 36.7,20 34.9,20 34.6,19.7 33.7,19.7 33.5,19.9 32.22,19.9 U1.P$AC11
  other vias: 31.9,20.22
GDR
  Top 0.15: Q3.1 12.03,24.57 R2_EP_DR.2 12,24.59 12,22.9 11.85,22.75 J1.2
GND  (via drill 0.35)
  Top 0.15: J4.A12_B1 v19.8,27.4 | C33.2 29.6,6.69 v29.6,6.3 | v30.9,8.3 30.9,8.84 C19.2 30.54,10.9 C7.2 | J2.3 J2.5 38.57,28.53 39.6,27.5 | C12.2 v40.4,21 | 24.82,16.78 C21.2 | v20.4,15.7 20.49,15.61 C25.2 | J1.17 11.29,15.3 12.2,15.3 12.4,15.5 13.6,15.5 13.82,15.28 EPD_C6.1 | J1.8 12.05,19.75 12.7,20.4 13.5,20.4 13.7,20.6 EPD_C1.1 | EPD_C2.1 15.22,22.2 v16.2,22.2 | EPD_C9.1 v16.5,24 | C38.1 18.12,21 v18.5,21 | v24,17.8 23.6,18.2 23.4,18.2 23.3,18.3 22.7,18.3 | 22.7,18.3 22.5,18.3 22.17,18.63 IC9.C3 IC9.C2 IC9.C1 IC9.B1 | 22.7,18.3 22.7,18.9 v22.8,19 | U1.P$78 29.3,15.97 U1.P$F23 28.65,15.95 28.1,15.4 27.6,15.4 27.04,14.84 C11.2 | U1.P$B7 32.9,15.37 U1.P$75 | U1.P$85 U1.P$74 | IC3.9 38.1,20.84 v38.1,20.2 | v38.3,17.3 37.55,18.06 R3.1 | 35.4,4.4 35.4,4.6 | 35.4,4.6 | IC2.B3 36.13,6.67 v36.6,6.2 | SW_DN.1 v35.4,4.8 | R2_USB.2 22.68,26.41 C43.2 | C22.2 43.84,3.27 C3.2
  Top 0.152: C23.1 21.6,21.5 v21.4,21.3 | C18.1 40.2,14.3 v40,14.1 | v41.9,13.1 41.9,10.28
  Route2 0.15: v29.6,6.3 29.6,7 v30.9,8.3 | IC3.8 38.45,21 v40.4,21 | v18.5,21 17.4,22.1 | 17.4,22.1 17.3,22.2 v16.2,22.2 | 17.4,22.1 17.4,19.9 17,19.5 17,19.2 18.4,17.8 18.8,17.8 18.95,17.95 C14.2 18.95,17.85 19.8,17 19.9,17 20.4,16.5 20.5,16.5 22.4,18.4 23.4,18.4 v24,17.8 | v38.1,20.2 39.1,19.2 39.1,18.4 38.3,17.6 v38.3,17.3 | v36.6,6.2 36.6,6.1 35.4,4.9 v35.4,4.8
  Route15 0.15: v16.2,22.2 16.5,22.5 v16.5,24
  Route15 0.152: v21.4,21.3 21.9,21.3 22.8,20.4 v22.8,19 | v40,14.1 41,13.1 v41.9,13.1
  Bottom 0.127: 27.41,29.1 J4.SH3 27.28,29.23 | 27.28,33.29 J4.SH1 | 18.64,33.29 J4.SH2 | 18.64,29.23 J4.SH4
  Bottom 0.15: v19.8,27.4 20.72,27.4 C43.2 | v24.25,14.4 23.8,14.4 | IC1.D2 22.58,14.4 23.6,14.4 23.8,14.2 23.8,14.4 | 23.8,14.4 23.8,14.8 24.1,15.1 24.1,15.5 23.6,16 23.6,17 23.4,17.2 22.1,17.2 22,17.3 21.2,17.3 20.4,16.5 v20.4,15.7
  other vias: 21.71,26.41 22.45,14.53 38.42,21.03 18.95,18.51
  pour Route2: -4.42,-2.62 50.17,-2.62 50.22,-2.57 50.22,37.32 -4.32,37.32
  pour Top: -4.72,-2.02 49.32,-2.02 49.32,36.72 -4.72,36.72
  pour Bottom: 48.22,-1.27 48.22,37.12 -3.02,37.12 -3.02,37.13 -2.72,-1.32 48.17,-1.32
HAPTIC_EN  (via drill 0.35)
  Top 0.15: U1.P$U1 36.08,18.72 v37.2,17.6 | IC2.A1 34.29,7 v33.3,7
  Route15 0.15: v37.2,17.6 37.2,17.5 38.1,16.6 38.1,14.5 35.4,11.8 35.4,8.1 34.3,7 v33.3,7
IMU_INT1  (via drill 0.35)
  Top 0.152: IC3.5 39.3,20 39.9,19.4 v39.9,18.9 | v35.4,18.1 35.02,17.72 U1.P$N1
  Bottom 0.152: v35.4,18.1 37.5,18.1 37.6,18 39.5,18 39.9,18.4 v39.9,18.9
IMU_INT2  (via drill 0.35)
  Top 0.152: IC3.6 39.5,20.5 v39.6,20.4
  Bottom 0.152: v39.6,20.4 39.3,20.1 39.3,18.9 38.7,18.3 37.8,18.3 37.3,18.8 34.9,18.8 34.15,18.05 U1.P$P2
  other vias: 34.15,17.97
LX1  (via drill 0.35)
  Top 0.15: L7.1 20.41,20.51 v19.8,19.9 | IC9.B3 IC9.B2
  Bottom 0.15: IC9.B2 21.2,19.53 20.8,19.93 19.83,19.93 v19.8,19.9
  other vias: 21.2,19.03
LX2  (via drill 0.35)
  Top 0.15: L7.2 22.47,23.17 20.8,21.5 20.8,20 v19.8,19 | IC9.D3 IC9.D2
  Bottom 0.15: v19.8,19 20.3,18.5 20.93,18.5 IC9.D2
  other vias: 21.2,18.23
MOSI  (via drill 0.35)
  Top 0.15: J1.14 13.45,16.75 v13.7,17
  Route15 0.15: v15.1,8.2 15.1,7.9 14.6,7.4 14.6,6.6 22.9,6.6 23.5,7.2 23.5,10.6 23.9,11 23.9,11.1 23.5,11.5 23.5,11.9 24.8,13.2 30.6,13.2 31.4,14 U1.P$B13
  Bottom 0.15: v13.7,17 14.1,16.6 14.1,9.2 v15.1,8.2
  other vias: 31.4,14.72
N$1
  Top 0.15: C4.1 44.89,5.1 44.36,4.56 C22.1 | 44.36,4.18 C22.1 | ANT1.1 42.03,7.18 43.47,5.73 L1.2 43.47,5.09 44.36,4.2 C22.1
N$2  (via drill 0.35)
  Top 0.15: IC9.D1 20.03,18.23 v19.9,18.1 | v17.2,18.1 17.2,18 18,17.2 18.43,17.2 R4.2
  Bottom 0.15: v19.9,18.1 19.7,17.9 17.4,17.9 v17.2,18.1
N$3  (via drill 0.35)
  Top 0.15: IC1.D1 22.05,14.05 v22.5,13.6 | R9.2 25.25,12.75 25.7,13.2 v25.7,14.1
  Route15 0.15: v25.7,14.1 25.1,13.5 v24.2,13.5
  Bottom 0.15: v22.5,13.6 23.2,12.9 23.6,12.9 v24.2,13.5
N$4  (via drill 0.35)
  Top 0.15: X1.3 44.61,22.19 45.5,21.3 45.5,20 45.2,19.7 43.2,19.7 43.14,19.64 C2.1 v42.3,19.1 | v32.8,13.4 34.7,13.4 35.1,13 35.2,13 35.5,13.3 36.6,13.3 v37.4,12.5 | U1.P$A23 28.65,12.42 v28.45,12.22
  Route15 0.15: v37.4,12.5 37.4,13.3 39.3,15.2 43.3,15.2 44,15.9 44,17.4 v42.3,19.1
  Bottom 0.15: v32.8,13.4 32.7,13.5 29.73,13.5 v28.45,12.22
N$5  (via drill 0.35)
  Top 0.15: IC9.E1 20.5,17.53 v20.5,17.4 | v20.8,10.9 20.8,11.3 21.79,12.29 R2.2
  Bottom 0.15: v20.5,17.4 20.4,17.3 19.1,17.3 18.6,16.8 18.6,16.2 19,15.8 19,15 19,12.2 20.3,10.9 v20.8,10.9
N$6
  Top 0.15: R1_USB.2 24.25,27.18 J4.A5
N$7
  Top 0.15: L2.2 35.92,8.88 35.92,9.18 35.27,9.83 L3.1
N$8
  Top 0.15: IC3.1 37.42,19.28 37,18.85 R3.2
N$9  (via drill 0.35)
  Top 0.15: C1.1 40.69,19.78 41.1,20.2 41.6,20.2 42.44,21.03 X1.1 | U1.P$B24 28.15,14.15 v28.1,14.1
  Top 0.152: v35.2,16.5 36.3,16.5 36.8,16 38.4,16 38.6,16.2 40.5,16.2 40.58,16.28 40.58,19.1 40.69,19.2 C1.1
  Route15 0.15: v35.2,15.1 v35.2,16.5
  Bottom 0.15: v28.1,14.1 33,14.1 33.7,14.8 34.9,14.8 v35.2,15.1
N$10  (via drill 0.35)
  Top 0.15: v27.6,10.8 27.6,13.3 26.5,14.4 26.5,15.5 26.8,15.8 26.8,16.2 27,16.4 27.9,16.4 28.1,16.2 28.38,16.2 U1.P$H23 | L1.1 42.47,5.03 43.06,4.44 C3.1 42.2,3 v41.7,2.5
  Route15 0.15: v39.1,5.8 37.7,5.8 36.1,4.2 33.7,4.2 32.2,5.7 27.3,5.7 26.9,6.1 26.9,8.7 27.1,8.9 27.1,10.5 27.4,10.8 v27.6,10.8
  Bottom 0.15: v39.1,5.8 39.9,5.8 41.7,4 v41.7,2.5
N$11
  Top 0.15: IC2.A2 34.96,7.46 35.7,8.2 37,8.2 37.31,8.52 C32.2
N$13  (via drill 0.35)
  Top 0.15: D2.1 16.18,32.57 D4.2 16.6,29.39 v16.6,28.9 | v17.4,16.8 16.83,16.8 C2-EP-DR.1
  Bottom 0.15: v16.6,28.9 16.6,24.8 15.4,23.6 15.4,16.5 15.6,16.3 16.9,16.3 v17.4,16.8
N$14
  Top 0.15: C9.1 27.97,17.54 U1.P$N24
N$15
  Top 0.15: SJ1.2 6.77,4.33 6.1,5 5.1,5 5,4.9 1.8,4.9 1.3,5.4 1.3,8.6 2.6,9.9 7.68,9.9 R1_EP_DR.1 8.5,10 9,9.5 9.57,9.5 R_TYPE_SEL.2
N$16  (via drill 0.35)
  Top 0.15: D5.2 32.11,33.71 v30.1,31.7 | v15.6,24.9 15.6,23.94 Q3.3 | C2-EP-DR.2 15.13,17.5 v14.8,17.5 14.8,16.98 L5.2
  Bottom 0.15: v30.1,31.7 15.9,31.7 15.4,31.2 15.4,25.7 | 15.4,25.7 15.4,25.1 v15.6,24.9 | 15.4,25.7 14.8,25.1 v14.8,17.5
N$17
  Top 0.15: J1.4 12.85,21.75 13.23,22.13 EPD_C2.2
N$18
  Top 0.15: J1.5 12.48,21.25 EPD_C1.2
N$20
  Top 0.15: C20.1 35.43,20.83 34.9,20.3 33.48,20.3 U1.P$AC5
N$22  (via drill 0.35)
  Top 0.15: L2.1 34.3,8.9 v34.1,9.1 | v33.9,14 U1.P$B3
  Route15 0.15: v32.6,12.5 32.9,12.8 33.3,12.8 33.7,13.2 33.7,13.8 v33.9,14
  Bottom 0.15: v34.1,9.1 33.5,9.7 33.5,11.9 32.9,12.5 v32.6,12.5
N$26
  Top 0.15: R2_USB.1 22.38,27.3 21.6,27.3 21.25,27.65 J4.B5
N$30
  Top 0.15: J1.18 12.66,14.75 EPD_C6.2
N$31
  Top 0.15: EPD_C7.2 14.88,14.3 11.29,14.3 J1.19
N$32
  Top 0.15: J1.20 12.88,13.75 EPD_C8.2
N$34
  Top 0.15: EPD_C10.2 17.3,11.08 17.3,12.1 17.1,12.3 16.7,12.3 16.2,11.8 14.7,11.8 14.5,12 13.2,12 12.45,12.75 J1.22
N$35
  Top 0.15: C13.1 30.03,14.09 U1.P$A18
N$37
  Top 0.15: J1.24 11.95,11.75 12.3,11.4 12.7,11.4 13.3,10.8 EPD_C12.2
OUT+
  Top 0.15: IC2.A3 37.65,7.17 TP_OP.TP
OUT-
  Top 0.15: IC2.C3 35.73,6.17 36.8,5.1 39.74,5.1 TP_ON.TP
P0.00/XL1  (via drill 0.35)
  Top 0.15: X2.1 38.25,10.71 36.34,12.62 C17.2 36.34,12.3 v34.4,12.3
  Bottom 0.15: U1.P$D2 34.45,15.77 35.7,15.77 35.85,15.62 35.85,14.45 33.7,12.3 v34.4,12.3
  other vias: 34.15,15.47
P0.01/XL2  (via drill 0.35)
  Top 0.15: U1.P$F2 34.43,15.97 34.5,15.9 36.4,15.9 36.8,15.5 38.7,15.5 v38.8,15.6 39.08,15.6 C18.2 | X2.2 39.26,12.5 v39.1,12.5
  Bottom 0.15: v38.8,15.6 39.3,15.1 39.3,12.7 v39.1,12.5
P0.13
  Top 0.15: C30.2 11.2,5.19 10.6,4.6 SW_UP.2 10.53,3.84 R5.1
P0.14
  Top 0.15: R8.1 24,7.4 23.25,6.66 C31.2 23.25,5.75 22.4,4.9 22,4.9 21.6,4.5 SW_ENT.2
P1.01  (via drill 0.35)
  Top 0.15: Q1.1 v4.8,6.4 | v28,10 27.7,10 26.2,11.5 25.5,11.5 25.4,11.6 25.4,12.3 26.2,13.1 26.2,14.7 v25.9,15 | v26.7,20.2 27.2,20.2 R_PWR_EPD.1 27.54,20.05 28.1,20.6 28.2,20.6 28.65,20.15 U1.P$Y23
  Route15 0.15: v25.9,15 25.4,15.5 25.4,16.9 26.7,18.2 26.7,18.5 26.8,18.6 27.5,18.6 27.6,18.7 27.6,19.5 26.9,20.2 v26.7,20.2
  Bottom 0.15: v4.8,6.4 4.8,5.6 6.1,4.3 8.4,4.3 9,3.7 10.5,3.7 11.1,4.3 15.8,4.3 16.5,3.6 16.5,1.8 17,1.3 19.6,1.3 19.9,1.6 19.9,4.3 20.1,4.5 28.2,4.5 28.5,4.8 28.5,9.5 v28,10
P1.02  (via drill 0.35)
  Top 0.15: R7.1 32,7.59 v31.8,7.8 31.4,8.2 31.4,10.1 v31.2,10.3 | C29.2 32.03,5.14 v31.9,5 32.6,4.3 SW_DN.2 | U1.P$W24 26.93,18 v25.5,18
  Route15 0.15: v31.2,10.3 30.8,9.9 28.7,9.9 28.6,10 28.6,10.8 27.4,12 v26.9,12
  Bottom 0.15: v31.8,7.8 31.9,7.7 v31.9,5 | v26.9,12 26.1,12.8 26,12.8 25.1,13.7 25.1,17.8 25.3,18 v25.5,18
PMIC_INT  (via drill 0.35)
  Top 0.15: IC1.A1 21.57,15.73 v21.3,16
  Route15 0.15: U1.P$T2 34.6,18.92 v34.6,23.2 | v15.3,15.1 15.5,15.3 19.2,15.3 19.9,16 19.9,16.2 20,16.3 21,16.3 v21.3,16
  Bottom 0.15: v34.6,23.2 36.7,25.3 40.4,25.3 42.3,27.2 42.3,32.7 41,34 32.7,34 30.9,32.2 30.2,32.2 29.9,32.5 29.9,33.4 29.7,33.6 28.7,33.6 28.2,33.1 28.2,32.4 27.8,32 12.3,32 9.4,29.1 9.4,27.4 12.1,24.7 13.8,24.7 14.2,24.3 14.2,17 15.3,15.9 v15.3,15.1
  other vias: 34.15,18.47
PREVGH  (via drill 0.35)
  Top 0.15: v19.2,24.7 19.2,24.64 EPD_C9.2 18.57,23.17 18.5,23.1 15,23.1 14.2,23.9 v12.5,23.9 | D5.1 28.8,33.59 v28.8,32.5 | J1.21 12.65,13.25 v12.7,13.2
  Route15 0.15: v19.2,24.7 20.1,25.6 22.5,25.6 22.7,25.8 22.7,30.6 23.3,31.2 28.7,31.2 28.8,31.3 v28.8,32.5
  Bottom 0.15: v12.7,13.2 12.7,23.7 v12.5,23.9
PREVGL
  Top 0.15: D2.2 11.73,31.7 9.4,31.7 9.3,31.6 9.3,23.7 8,22.4 8,19.6 9.2,18.4 9.2,12.5 9.45,12.25 J1.23 12.35,12.25 13,11.6 14.2,11.6 15.15,10.65 EPD_C11.2
RESE  (via drill 0.35)
  Top 0.15: R1_EP_DR.2 8.25,9.44 v8.5,9.2 | v9.3,22 9.55,22.25 J1.3 12.15,22.25 13.17,23.27 Q3.2
  Bottom 0.15: v8.5,9.2 8.5,21.2 v9.3,22
RESET  (via drill 0.35)
  Top 0.15: J2.6 39.04,29.65 42.6,28.78 42.6,25.51 TP_RESET.TP 40.19,23.1 v39,23.1
  Bottom 0.15: U1.P$AC13 31.4,20.72 31.48,20.8 36.7,20.8 v39,23.1
  other vias: 31.4,20.22
SCK  (via drill 0.35)
  Top 0.15: J1.13 11.34,17.15 12.15,17.15 12.9,17.9 v13.2,17.9 | v31.3,12.7 31.65,13.05 U1.P$A12
  Route15 0.15: v13.6,8.6 13.6,6.2 24.3,6.2 24.6,6.5 24.6,11.1 24.1,11.6 24.1,12 25,12.9 31.1,12.9 v31.3,12.7
  Bottom 0.15: v13.2,17.9 13.2,17.3 13.1,17.2 13.1,14 13.6,13.5 v13.6,8.6
SCL  (via drill 0.35)
  Top 0.15: R17.2 38.7,4.3 38.8,4.2 | 38.8,4.2 39.9,3.1 41.1,3.1 41.8,3.8 41.8,4.9 39.55,7.15 TP_SCL.TP | 38.8,4.2 38.8,3.8 v38.6,3.6 | v33.6,5.6 34.17,6.17 IC2.C1 | v26.1,10.3 25.04,10.3 U3.7 | v36.8,19.3 36.8,19.7 37.1,20 IC3.12 | v19.3,16.5 19.25,16.55 R4.1
  Route15 0.15: v36.8,19.3 36.6,19.1 36.6,13.6 32.3,9.3 v32.3,8.8
  Bottom 0.15: v38.6,3.6 38.2,3.2 36,3.2 34.85,4.35 | 34.85,4.35 v33.6,5.6 | 34.85,4.35 30.35,4.35 29,5.7 29,8.8 29.1,8.9 29.5,8.9 | 26.3,11.3 26.4,11.4 28.7,11.4 28.9,11.2 28.9,9.5 29.5,8.9 | 26.3,11.3 26.1,11.1 v26.1,10.3 | 26.3,11.3 24.9,11.3 24.3,10.7 23.3,10.7 21.3,12.7 21.3,15 | IC1.B1 21.92,15.2 21.5,15.2 21.3,15 | U1.P$M2 33.85,17.77 33.85,18.75 34.4,19.3 v36.8,19.3 | v32.3,8.8 29.6,8.8 29.5,8.9 | v19.3,16.5 19.3,15.9 20.2,15 21.3,15
  other vias: 22.05,15.33 34.15,17.47
SDA  (via drill 0.35)
  Top 0.15: TP_SDA.TP 18.53,13.65 R18.2 21.3,13.65 21.4,13.75 | 21.4,13.75 21.54,13.75 R2.1 21.9,13.5 22.5,12.9 v22.5,12.6 | IC1.C1 21.63,14.93 21.5,14.8 21.5,13.84 21.4,13.75 | v24.8,11.8 24.88,11.72 U3.8 24.92,11 26.3,11 27.8,9.5 v27.8,9.1 | U1.P$L1 36.38,17.22 37.08,16.52 v37.25,16.52 38.85,16.52 39.02,16.69 39.02,17.38 37.92,18.47 IC3.2
  Route15 0.15: v27.8,9.1 30.53,6.37 33.57,6.37 33.6,6.4 34.69,6.4 IC2.B2
  Bottom 0.15: IC2.B2 34.96,12.26 35.6,12.9 36.5,12.9 37.25,13.65 v37.25,16.52 | v22.5,12.6 22.9,12.6 23.4,12.1 24.5,12.1 v24.8,11.8
  other vias: 34.96,6.67
SWDCLK  (via drill 0.35)
  Top 0.15: U1.P$AA24 27.23,18.8 v26,18.8 | v31.2,25.9 31.83,26.53 31.83,27.18 TP_SWDCLK.TP
  Top 0.3: J2.4 36.51,30.9 v36.3,30.9 | v32.1,29.1 31.43,28.43 TP_SWDCLK.TP
  Bottom 0.15: v26,18.8 24.7,20.1 23.1,20.1 22.2,21 22.2,21.8 24,23.6 28.8,23.6 29.8,24.6 31.2,24.6 v31.2,25.9
  Bottom 0.3: v36.3,30.9 36.3,30.4 33.4,30.4 v32.1,29.1
SWDIO  (via drill 0.35)
  Top 0.15: U1.P$AC24 27.23,19.3 v26.9,19.3 | v24.2,22.9 24.2,24.2 v24.3,24.3 | v29.8,28 29.8,28.88 TP_SWDIO.TP
  Top 0.3: J2.2 36.03,30.4 31.32,30.4 TP_SWDIO.TP
  Route15 0.15: v24.3,24.3 29,24.3 30,25.3 30,27.8 v29.8,28
  Bottom 0.15: v26.9,19.3 26.2,19.3 24.2,21.3 v24.2,22.9
SWO
  Top 0.15: TP_SWO.TP 26.18,21.7 28.4,21.7 29.15,20.95 U1.P$AD22
VBAT
  Top 0.3: C37.2 23.64,12.44 23.6,12.4 | 23.6,12.4 23.1,11.9 22.1,11.9 21.7,11.5 21.7,10.6 21.8,10.5 22.86,10.5 U3.2 U3.3 22.26,9.96 22,9.7 22,9.5 20.85,8.35 TP_VBAT.TP 20.99,8.12 C27.2 | IC1.C2 22.77,14.93 23.2,14.5 23.2,12.8 23.6,12.4
VBUS  (via drill 0.35)
  Top 0.3: IC1.A2 22.45,15.95 | 22.45,15.95 23.11,16.61 C21.1 | 19.7,26.32 C42.2 18.4,26.3 v18.4,25.7 | 19.7,26.32 20.62,26.32 C43.1 20.6,26.52 J4.A9_B4 | U1.P$AD2 34.15,21.55 33.65,22.05 33.65,22.35 32.8,23.2 30.2,23.2 29.5,22.5 28.7,22.5 28.4,22.8 28.4,23.45 D3.5 28.29,22.69 27.8,22.2 26.6,22.2 | 22.45,15.95 21.7,16.7 v21.7,16.8 | v18.8,20 18.55,20.25 C38.2 | J4.A4_B9 25.5,28.5 25.5,25.8 25.4,25.7 | 26.5,22.3 26.6,22.2 | 19.7,26.32 19.8,26.22 19.8,25.6 19.9,25.5 25.2,25.5 25.4,25.7 | 26.6,22.2 26.2,22.2 25.4,23 25.4,25.7
  Route15 0.3: v18.4,25.7 18.4,22.3 19.75,20.95 v18.8,20 | v18.8,20 18.7,19.9 | v21.7,16.8 21.6,16.7 20.1,16.7 19.9,16.9 19.9,17.1 19.7,17.3 19.5,17.3 19,17.8 18.6,17.8 18,18.4 18,18.5 18.8,19.3 v18.8,20
VREG  (via drill 0.35)
  Top 0.3: IC1.B2 23.37,15.33 v23.4,15.3 | v21.8,20.4 21.8,19.63 IC9.A3 IC9.A2 IC9.A1 | v21.8,20.4 22.22,20.4 C39.1 23.57,21.42 TP_VREG.TP | v21.8,20.4 21.8,20.66 C23.2 | C24.2 20.3,12.11 v20.3,13
  Route15 0.3: v21.8,20.4 22,20.4 22.4,20 22.4,19.6 22.1,19.3 22.1,17.8 22.4,17.5 22.4,16.3 v23.4,15.3 23.5,15.2 23.5,12.5 22.8,11.8 21.9,11.8 20.7,13 v20.3,13 20.5,13
(copper drawn outside any net)
  shapes: Bottom area x1, Route2 area x1, Top area x1